# Altium PCB nRF24LE1F16Q32.PcbDoc
Units mil, origin at the board's own origin, x right, y up, seen from the top; angles counter-clockwise.
Board outline 6000 x 4000 mil, 2 copper layers (Top Layer, Bottom Layer); 18 components, 13 nets, 69 pads, 36 vias.
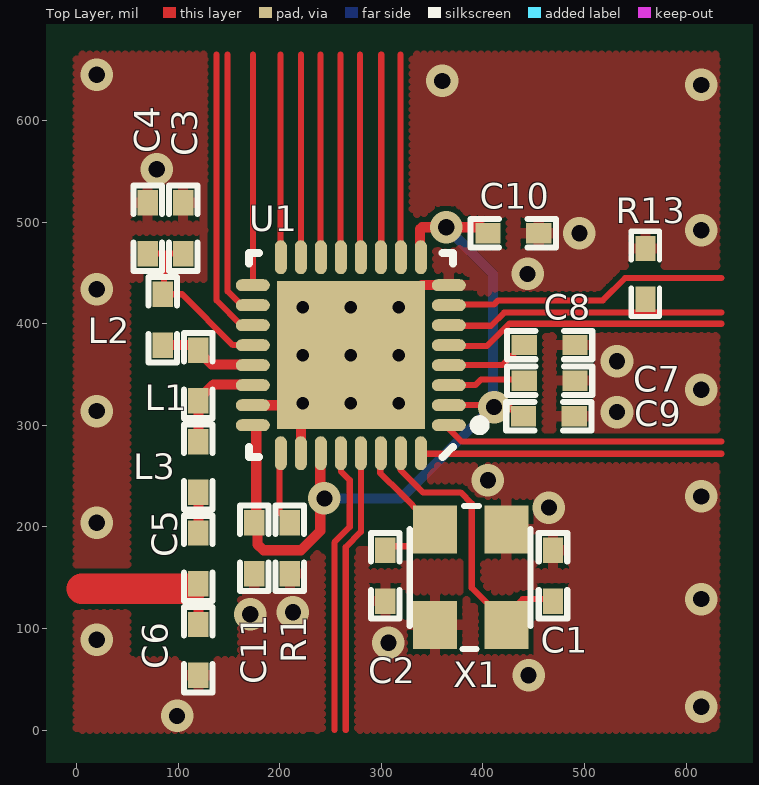
[diagram p0: Top Layer view]
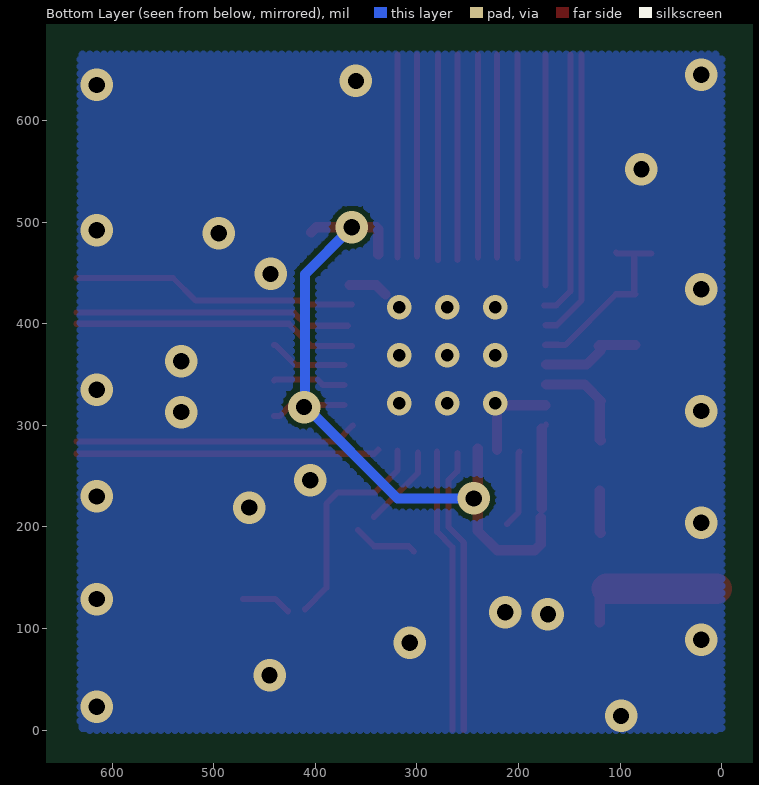
[diagram p1: Bottom Layer view, seen from below]

## Layer stack, top to bottom
Top Layer: signal copper 1.4
Dielectric: dielectric 12.6, FR-4, Dk 4.8
Bottom Layer: signal copper 1.4

## Board outline
-2235,-1735 3765,-1735 3765,2265 -2235,2265

## Design rules (kind name [scope] priority, off if disabled: settings)
Clearance [All] p1: gap=5
ComponentClearance [All] p1 off: gap=10 collisioncheckmode=3 verticalgap=10
PolygonConnect PolygonConnect_1 [isvia and innet(GND)] p1: connectstyle=Direct reliefconductorwidth=10 reliefentries=4 polygonreliefangle="90 Angle"
PolygonConnect [All] p2: connectstyle=Relief reliefconductorwidth=10 reliefentries=4 polygonreliefangle="90 Angle"
RoomDefinition nRF24LE1F16Q32 [InComponentClass('nRF24LE1F16Q32')] p1 off: confinementstyle=ConfineIn formatcopy=TRUE lockcomponents=FALSE outline -3235,-2735 -1235,-2735 -1235,-1735 -3235,-1735
RoutingVias [All] p1: holewidth=28 width=50 viastyle="Through Hole" minholewidth=1 minwidth=1 maxholewidth=28 maxwidth=50
SolderMaskExpansion [All] p1: expansion=4
TestPointUsage [All] p1: valid=0 allowmultiple=FALSE
Testpoint [All] p1: side=15 testpointundercomponent=TRUE minsize=40 maxsize=100 preferedsize=60 minholesize=0 maxholesize=40 preferedholesize=32 testpointgrid=1 style=1023 order=0-112345678
Width [All] p1: maxlimit=100 minlimit=1 preferedwidth=10 minimp=50.000000 maximp=50.000000 favimp=50.000000
18 further rules are at their usual default settings.

## Components (designator, comment, footprint, x,y, rotation, side; value= is the part's Value field where it differs from the comment)
C1 "NP0 50V" 0402s 469,152 r270 top
C2 "NP0 50V" 0402s 304,152 r90 top
C3 "X7R 16V" 0402s 105,494 r270 top
C4 "NP0 50V" 0402s 70,494 r270 top
C5 "NP0 +/-0.1pF, 50V" 0402s 120,169 r90 top
C6 "NP0 +/-0.1pF, 50V" 0402s 120,79 r270 top
C7 "X7R 16V" 0402s 465.67,344 r180 top
C8 "X7R 16V" 0402s 465.67,379 r180 top
C9 "X7R 16V" 0402s 465,309 r180 top
C10 "X7R 16V" 0402s 430,489 r180 top
C11 "X7R 16V" 0402s 175,179 r270 top
L1 "Murata LQP15MN6N8B02D" 0402s 120,349 r270 top
L2 "Murata LQP15MN6N8B02D" 0402s 85,404 r270 top
L3 "Murata LQP15MN4N7B02D" 0402s 120,259 r270 top
R1 "1%" 0402s 210,179 r270 top
R13 "" 0402s 560,449 r270 top
U1 "QFN32 5x5 package" Nordic_QFN50P500X500X90-33N 270,369 r180 top
X1 "TSX-3225, 16MHz, Cl=9pF, +/-10ppm" "bt-xtal 3225" 408,103.67 r90 top

## Footprints (in the part's own frame and the unit in brackets; to place one, negate y for a bottom-side part, rotate by r counter-clockwise, add the part's x,y. Pads: shape width x height; smd on the part's side, far side on the other; paste and mask are expansions set on the pad)
0402s [mil]
  rect 25x20 smd: 1(-25,0) 2(25,0)
  silkscreen extent -42,-14 42,14
"bt-xtal 3225" [mm] "Mercury X32 series"
  rect 1.2x1.1 smd: 1(0,-0.381) 2(2.388,-0.381) 3(2.388,1.397) 4(0,1.4)
  silkscreen extent -0.61,-0.99 2.97,2.03
Nordic_QFN50P500X500X90-33N [mm] "QFN32 5x5x0.85mm, 0.5mm pitch - Medium Density"
  oval 0.85x0.3 smd mask+0.076: 1(-2.45,1.75) 2(-2.45,1.25) 3(-2.45,0.75) 4(-2.45,0.25) 5(-2.45,-0.25) 6(-2.45,-0.75) 7(-2.45,-1.25) 8(-2.45,-1.75) 17(2.45,-1.75) 18(2.45,-1.25) 19(2.45,-0.75) 20(2.45,-0.25) 21(2.45,0.25) 22(2.45,0.75) 23(2.45,1.25) 24(2.45,1.75)
  oval 0.3x0.85 smd mask+0.076: 9(-1.75,-2.45) 10(-1.25,-2.45) 11(-0.75,-2.45) 12(-0.25,-2.45) 13(0.25,-2.45) 14(0.75,-2.45) 15(1.25,-2.45) 16(1.75,-2.45) 25(1.75,2.45) 26(1.25,2.45) 27(0.75,2.45) 28(0.25,2.45) 29(-0.25,2.45) 30(-0.75,2.45) 31(-1.25,2.45) 32(-1.75,2.45)
  rect 3.7x3.7 smd mask+0: 33(0,0)
  silkscreen extent -3.35,-2.55 2.55,2.55

## Part data
C1 C2 C3 C4 C5 C6 C7 C8 C9 C10 C11: library part Cap, "Capacitor"
L1 L2 L3: library part Inductor, "Inductor"
R1 R13: library part Res2, "Resistor"
U1: library part "nRF24LE1 - 5x5", "2.4GHz Tranceiver with embedded MCU and 10 bit ADC"
X1: library part BT-XTAL, "Crystal"

## Via types
v1: diameter 32, hole 16, Top Layer to Bottom Layer, tented both sides, 27 vias
v2: diameter 24, hole 12, Top Layer to Bottom Layer, tented both sides, 9 vias

## Nets (pads, with @x,y where several pads share a name; then routed paths per layer and width w, separated by ;. In a path a pad name is that pad's centre, name@x,y a point inside that pad or via, vN(x,y) a via of type N, cw(c..) or ccw(c..) an arc to the next point about the centre after c; other vN are vias at no path point)
GND: C1.1 C2.1 C3.1 C4.1 C6.2 C7.1 C8.1 C9.1 C10.1 C11.2 R1.2 R13.1 U1.8 U1.23 U1.26 U1.33 X1.2 X1.4 | length 124.9
  Top Layer w10: U1.23 221.21,319.79 U1.33@223,318 ; U1.26@221,276 U1.33@221,312 ; U1.33@331,429 340,438 U1.8@366,438
  other v1: 99,14 615,23 445,54 307,86 20,89 171,114 213,116 615,129 20,204 465,219 615,230 405,246 532,313 20,314 615,335 532,363 20,434 444,449 495,489 615,492 79,552 615,635 360,639 20,645
  other v2: 222.76,321.76 270,321.76 317.24,321.76 222.76,369 270,369 317.24,369 222.76,416.24 270,416.24 317.24,416.24
NetC1_2: C1.2 U1.31 X1.1 | length 264.3
  Top Layer w6: U1.31@319,275 319,256 341,234 378,234 389,223 389,140 X1.1@410,119 ; X1.1@427,117 439,129 C1.2@471,129
NetC2_2: C2.2 U1.30 X1.3 | length 143.8
  Top Layer w6: U1.30@299,273 299,253 319.5,232.5 ; C2.2@303,176 308,181 342,181 X1.3@358,197 ; 320,232 X1.3@342,210
NetC3_2: C3.2 C4.2 L2.1 U1.20 | length 196.4
  Top Layer w6: C4.2@69,469 103,469 C3.2@104,470 ; L2.1 104,429 154,379 U1.20@174,379 ; L2.1@86,430 86,469 ; U1.20@160.53,379.47 U1.20@172.84,379.47
NetC5_1: C5.1 C6.1 | length 146.8
  Top Layer w10: C5.1@117,139 C5.1@119,141 ; C6.1@120,106 C5.1@120,142
  Top Layer w30: 5,139 C5.1@113,139
NetC5_2: C5.2 L3.2 | length 42.4
  Top Layer w10: C5.2@119,194 120,195 L3.2@120,236
NetC7_2: C7.2 U1.3 | length 71.9
  Top Layer w6: U1.3@371.5,339.79 392.79,339.79 398.2,345.2 439.47,345.2 C7.2
NetC8_2: C8.2 U1.4 | length 77.3
  Top Layer w6: U1.4@371.5,359.47 419.47,359.47 439,379 C8.2
NetL1_1: L1.1 L2.2 U1.21 | length 96.5
  Top Layer w10: L2.2 120,379 L1.1@121,378 ; L1.1@118.67,374 132.88,359.79 U1.21@172.84,359.79
NetL1_2: L1.2 L3.1 U1.22 | length 100.3
  Top Layer w10: L1.2@118.67,324 134.77,340.1 U1.22@172.84,340.1 ; L3.1@119,285 120,286 L1.2
NetR1_1: R1.1 U1.25 | length 76
  Top Layer w6: U1.25@199,274 200,273 200,224 200,214 R1.1@211,203
NetR13_2: R13.2 U1.6 | length 272.4
  Top Layer w6: U1.6@368,398 408,398 421,411 635,411
VCC_NRF: C9.2 C10.2 C11.1 U1.2 U1.9 U1.24 U1.27 | length 844.3
  Top Layer w6: U1.24@172.84,300.73 U1.24@177,296.58 ; v1@236,234 238,234 v1(244,228) ; U1.2@371.5,320.1 423.9,320.1 435,309 C9.2@440.67,309
  Top Layer w10: 177,218 U1.24@177,296.58 ; C11.1@178,209 178,183 184,177 221,177 240,196 U1.27@240,277 ; U1.9@338,468 338,493 340,495 399,495 C10.2@404,490
  Bottom Layer w10: v1(244,228) 319,228 410,319 410,449 365,494 v1@365,499
  other v1: 411,318 364,495
pads on no net: U1.1 U1.5 U1.7 U1.10 U1.11 U1.12 U1.13 U1.14 U1.15 U1.16 U1.17 U1.18 U1.19 U1.28 U1.29 U1.32
copper on no net: | length 3885.9
  Top Layer w6: 137.79,665 137.79,423 162.26,398.53 173.54,398.53 ; 148.79,665 148.79,432 162.79,418 175,418 ; 173.54,437.9 173.54,665 ; 201,464 201,665 ; 221,465 221,665 ; 240,465 240,665 ; 253.79,0 253.79,184.79 269,200 269,246 260.16,254.84 260.16,272.54 ; 260,463 260,665 ; 265,0 265,180.21 280,195.21 280,274 ; 279,463 279,665 ; 300,466 300,665 ; 319,465 319,665 ; 338,276 342,272 635,272 ; 363,300 379,284 635,284 ; 364,378 404,378 426,400 635,400 ; 364,419 411,419 415,423 518,423 540,445 635,445

## Polygon pours and split planes (outlines as drawn)
GND on Top Layer "Top Layer" (hatched 90Degree grid 7 track 8, remove dead copper, pour order 1000): 0,665 630,665 630,4.72 626.06,0 0,0
GND on Bottom Layer "Top Layer" (hatched 90Degree grid 7 track 8, remove dead copper, pour order 1001): 0,665 631,665 631,4.72 627.06,0 0,0

## Other copper
Top Layer:
  pour cut-out: 50,444 162,444 162,69 50,69
  pour cut-out: 215.5,255 226.5,255 226.5,251 215.5,251
  pour cut-out: 170.5,500.5 198,500.5 198,474 170.5,474